# Altium PCB CH340T-BREAKOUT.PcbDoc
Units mm, origin at the board's own origin, x right, y up, seen from the top; angles counter-clockwise.
Board outline 20.38 x 20.38 mm, 2 copper layers (Top Layer, Bottom Layer), stack 1.57 mm thick; 12 components, 21 nets, 70 pads, 17 vias.
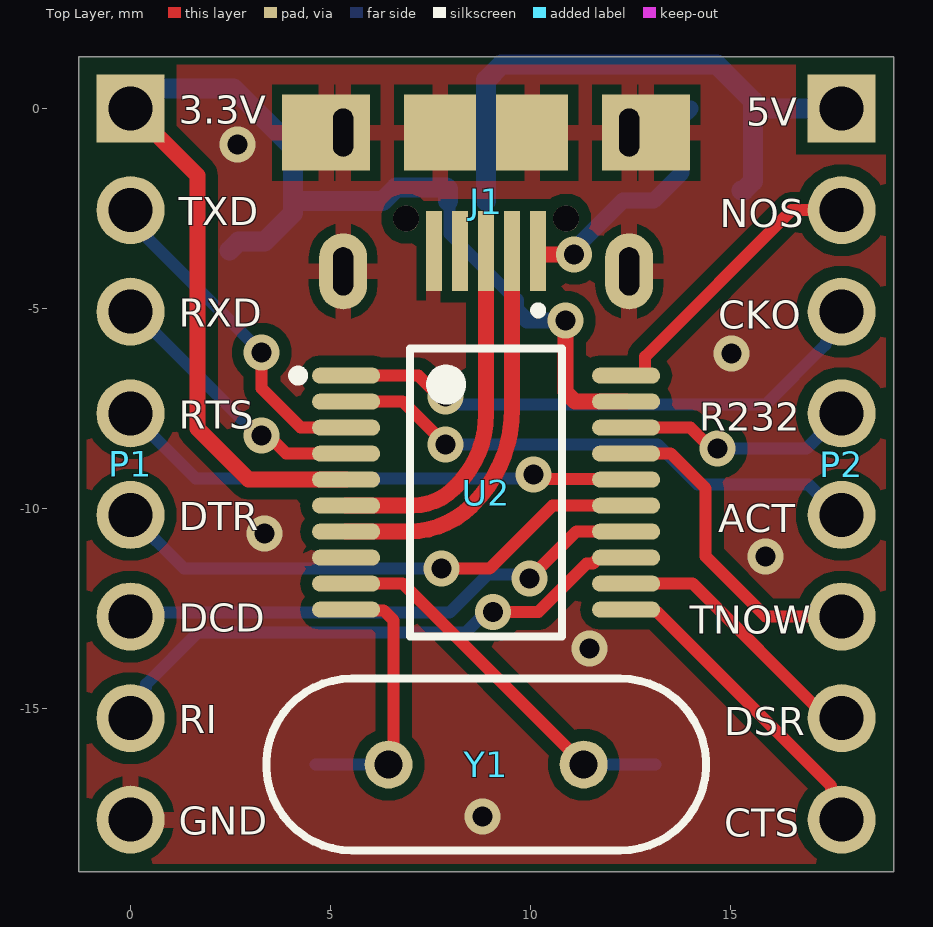
[diagram p0: Top Layer view]
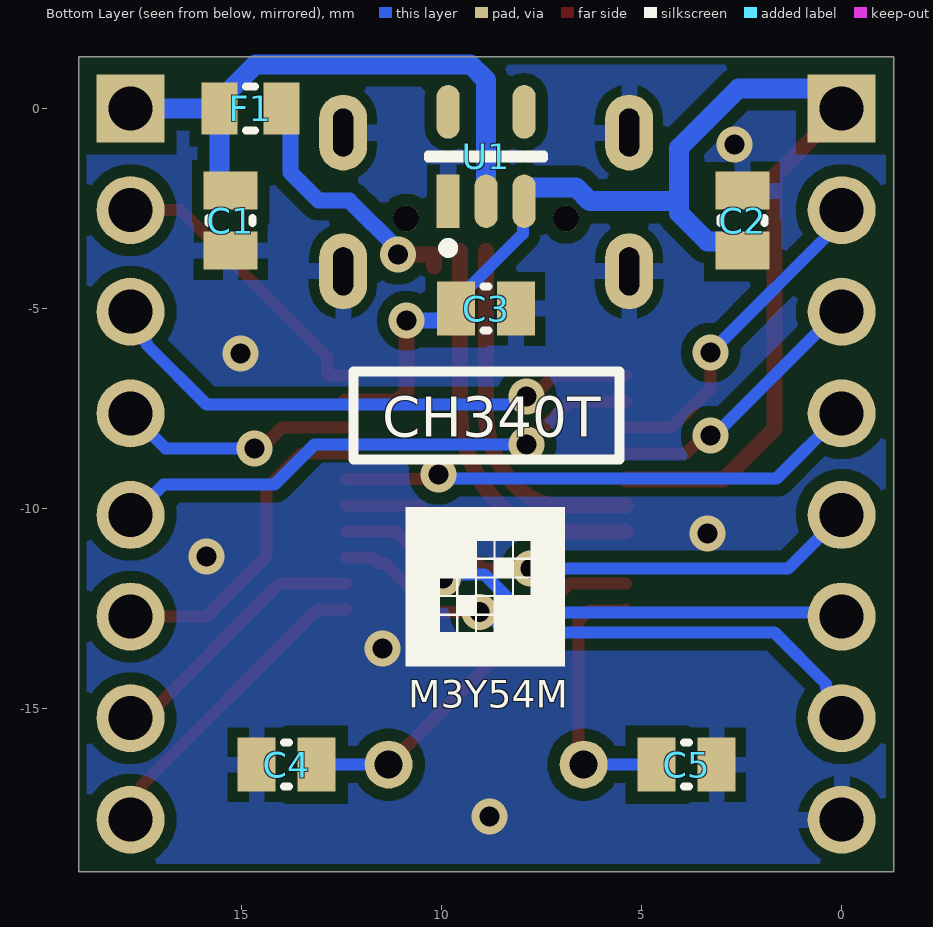
[diagram p1: Bottom Layer view, seen from below]
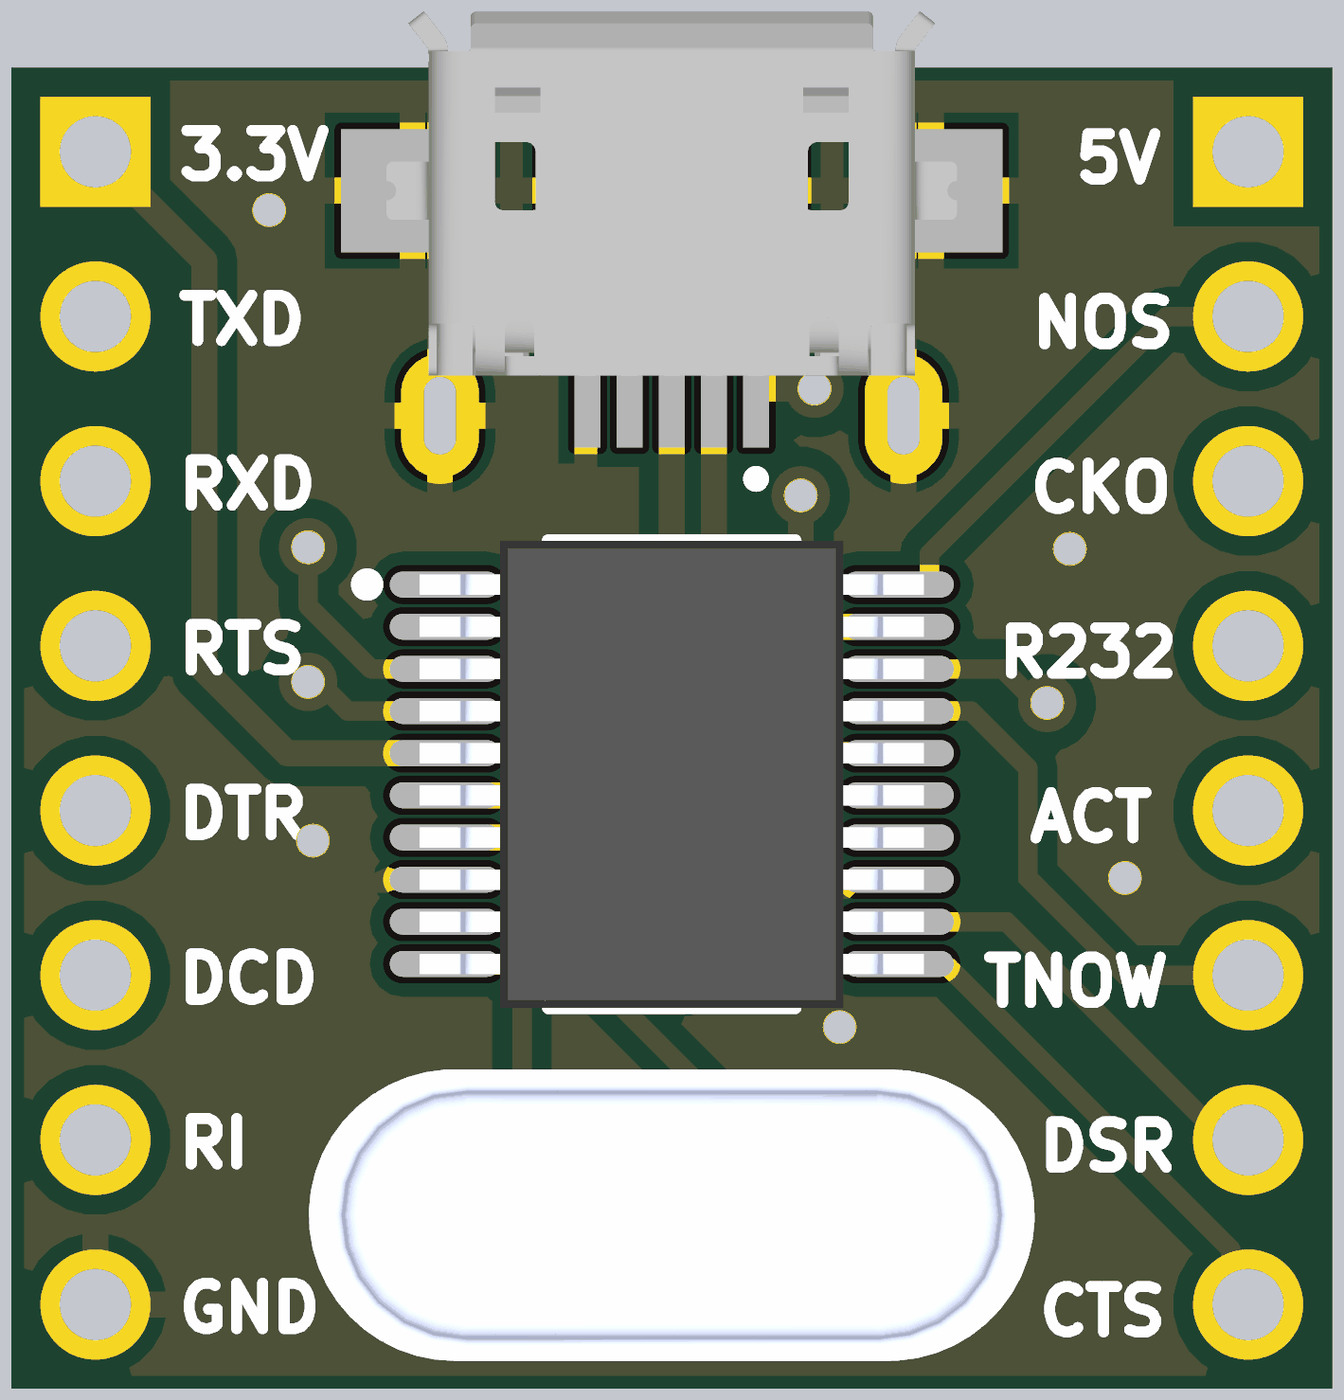
[diagram p2: 3D render of the assembled board from above, using the file's embedded part models]
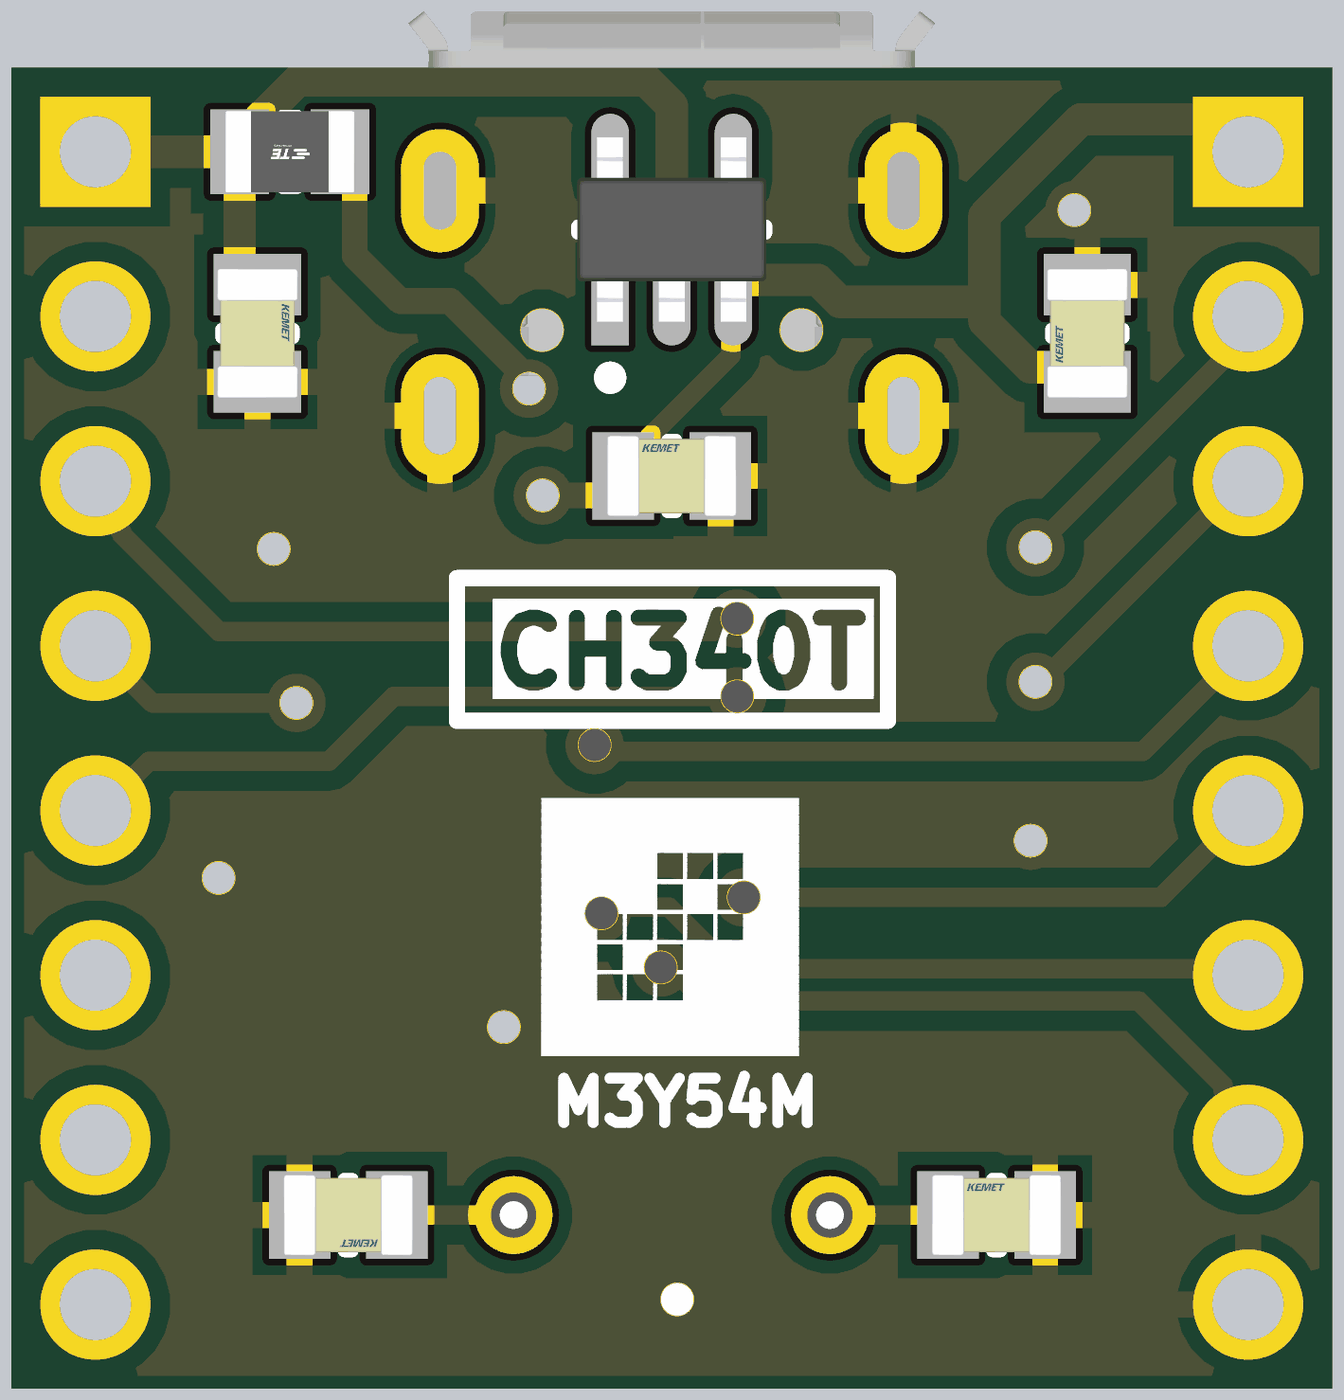
[diagram p3: 3D render of the assembled board from below, using the file's embedded part models]

## Layer stack, top to bottom
Top Solder: solder mask 0.015, Solder Resist, Dk 3.5
Top Layer: signal copper 0.035
Dielectric 1: dielectric 1.5, FR-4, Dk 4.2
Bottom Layer: signal copper 0.035
Bottom Solder: solder mask 0.015, Solder Resist, Dk 3.5

## Board outline
-1.3,-19.08 -1.3,1.3 19.08,1.3 19.08,-19.08

## Design rules (kind name [scope] priority, off if disabled: settings)
BoardOutlineClearance [All] p1: gap=0.2 ignorepadtopadclearanceinfootprint=FALSE
Clearance Clearance_Polygon_Fiducials [All vs InComponent('FID?')] p1: gap=1.3 ignorepadtopadclearanceinfootprint=FALSE
Clearance Clearance_Polygon [InPolygon] p2: gap=0.3 ignorepadtopadclearanceinfootprint=FALSE
Clearance [All] p3: gap=0.15 ignorepadtopadclearanceinfootprint=FALSE except(0: Arc-Hole Track-Hole SMDPad-Hole THPad-Hole Via-Hole Fill-Hole Poly-Hole Region-Hole Text-Hole)
HoleSize [All] p1: absolutevalues=TRUE maxlimit=3.5 minlimit=0.3 maxpercent=80.000 minpercent=20.000
MinimumSolderMaskSliver [All] p1: minsoldermaskwidth=0.15
PolygonConnect PolygonConnect_Via [IsVia] p1: connectstyle=Direct reliefconductorwidth=0.4 reliefentries=4 polygonreliefangle="90 Angle" airgapwidth=0.25
PolygonConnect [All] p2: connectstyle=Relief reliefconductorwidth=0.4 reliefentries=4 polygonreliefangle="90 Angle" airgapwidth=0.25
RoutingVias [All] p1: holewidth=0.4 width=0.7 viastyle="Through Hole" minholewidth=0.4 minwidth=0.6 maxholewidth=2 maxwidth=3
SilkToSilkClearance [All] p1: silktosilkclearance=0.15
SilkToSolderMaskClearance [IsPad] p1: minsilkscreentomaskgap=0.1 clearancetoexposedcopper=TRUE
SolderMaskExpansion SolderMaskExpansion_Via [IsVia] p1: expansion=0.102 istentingtop=TRUE soldermaskfromhole=TRUE
SolderMaskExpansion [All] p2: expansion=0.102 istentingtop=FALSE
Width [All] p1: maxlimit=2 minlimit=0.25 preferedwidth=0.3
26 further rules are at their usual default settings.

## Components (designator, comment, footprint, x,y, rotation, side; value= is the part's Value field where it differs from the comment)
C1 "C0805C104K5RAC7411" C0805 15.28,-2.8 r270 bottom value=10uF_50V
C2 "C0805C104K5RAC7411" C0805 2.48,-2.8 r90 bottom value=10uF_50V
C3 "C0805C104K5RAC7411" C0805 8.89,-5 r180 bottom value=100nF_50V
C4 "C0603C220J5GACAUTO" C0805 13.88,-16.4 r0 bottom value=22pF_50V
C5 "C0603C220J5GACAUTO" C0805 3.88,-16.4 r180 bottom value=22pF_50V
F1 "MF-PSMF050X-2" R0805 14.78,0 r0 bottom value=500mA_6V_PTC
J1 "629105150921" CON-MICRO-USB-B-SMD-WITH-HOLDER 8.89,-0.6 r180 top
P1 "CON-HDR-1X8" CON-HDR-1X8-2.54 0,0 r270 top
P2 "CON-HDR-1X8" CON-HDR-1X8-2.54 17.78,0 r270 top
U1 "HT7533-2-SOT23-5" SOT-23-5 8.89,-1.2 r90 bottom
U2 "CH340T" SSOP-20 8.89,-9.6 r0 top
Y1 "12MHz" HC-49-US-TH 8.89,-16.4 r180 top

## Footprints (in the part's own frame and the unit in brackets; to place one, negate y for a bottom-side part, rotate by r counter-clockwise, add the part's x,y. Pads: shape width x height; smd on the part's side, far side on the other; paste and mask are expansions set on the pad)
C0805 [mm] "FP-C0805C-DN-MFG"
  rect 0.95x1.35 smd: 1(-0.75,0) 2(0.75,0)
  silkscreen extent -0.06,-0.55 0.06,0.55, body extent -1,-0.63 1,0.63, height 0.88
CON-HDR-1X8-2.54 [mm] "Connector; Header; 8 Position, 2.54 Pitch"
  rect 1.7x1.7 hole 1.1 paste-1000 mask+0: 1(0,0)
  round 1.7 hole 1.1 paste-1000 mask+0: 2(2.54,0) 3(5.08,0) 4(7.62,0) 5(10.16,0) 6(12.7,0) 7(15.24,0) 8(17.78,0)
CON-MICRO-USB-B-SMD-WITH-HOLDER [mm] "MICRO USB 5P female seat B type 7.2 four-pin board foot length 1.3 with column curling"
  rect 0.4x2 smd: 1(-1.3,2.96) 2(-0.65,2.96) 3(0,2.96) 4(0.65,2.96) 5(1.3,2.96)
  rect 2.2x1.9 smd: Shell(-4,0) Shell(4,0)
  oval 1.2x1.9 hole 0.5 slot 1.2 at 90 deg: Shell(-3.575,3.47) Shell(-3.575,0) Shell(3.575,3.47) Shell(3.575,0)
  rect 1.8x1.9 smd: Shell(-1.15,0) Shell(1.15,0)
  round 0.65 hole 0.65 paste+0 mask+0: ""(-2,2.15) ""(2,2.15)
  silkscreen extent -1.4,4.35 -1.2,4.54, body extent -4.4,-2.77 4.4,2.86, height 2.79
HC-49-US-TH [mm] "THD, 2-Leads, Body 11.35x4.65mm, Pitch 4.88mm"
  round 1.2 hole 0.7: 1(-2.44,0) 2(2.44,0)
  silkscreen extent -5.5,-2.15 5.5,2.15, body extent -5.42,-2.25 5.43,2.25, height 3.68
R0805 [mm] "FP-CRG0805-IPC_C"
  rect 0.906x1.307 smd: 1(-0.776,0) 2(0.776,0)
  silkscreen extent -0.11,-0.55 0.11,0.55, body extent -1,-0.63 1,0.63, height 0.65
SOT-23-5 [mm]
  rect 1.338x0.578 smd: 1(-1.116,0.95)
  rrect100% 1.338x0.578 smd: 2(-1.116,0) 3(-1.116,-0.95) 4(1.116,-0.95) 5(1.116,0.95)
  silkscreen extent -2.41,-1.45 0.05,1.45, body extent -1.42,-1.46 1.42,1.46, height 1.08
SSOP-20 [mm] "SSOP20-0.65-7.6X5.2MM"
  oval 1.7x0.4 smd: 1(-3.5,2.925) 2(-3.5,2.275) 3(-3.5,1.625) 4(-3.5,0.975) 5(-3.5,0.325) 6(-3.5,-0.325) 7(-3.5,-0.975) 8(-3.5,-1.625) 9(-3.5,-2.275) 10(-3.5,-2.925) 11(3.5,-2.925) 12(3.5,-2.275) 13(3.5,-1.625) 14(3.5,-0.975) 15(3.5,-0.325) 16(3.5,0.325) 17(3.5,0.975) 18(3.5,1.625) 19(3.5,2.275) 20(3.5,2.925)
  silkscreen extent -4.82,-3.6 1.9,3.6, body extent -3.89,-3.6 3.89,3.6, height 1.99

## Part data
C1 C2 C3: library part CAPACITOR, "C0805 0.10 μF X7R 30ppm/°C 10.00% 50 V", Capacitance=100nF, Manufacturer=KEMET, Package=C0805C-DN, Temperature="-55°C to +125°C", Temperature Characteristic=X7R, Temperature Coefficient=30ppm/°C, Temperature Range High=+125°C, Temperature Range Low=-55°C, Tolerance=0.1, Voltage Rating="50 V", Automotive=No, Category=Cap, ComponentLink2Description=Datasheet, ComponentLink2URL=https://content.kemet.com/datasheets/KEM_C1003_C0G_SMD.pdf, Device Class L1="Passive Components", Device Class L2=Capacitors, Device Class L3="Ceramic Capacitors", Height=0.88mm, Ipc Land Pattern Name=CAPC200125X78, Lead Free=Yes, Manufacturer Part Number=C0805C104K5RAC7411, Material=Ceramic, Octopart=https://octopart.com/c0805c104k5rac7411-kemet-18508045, RoHS=TRUE
C4 C5: library part CAPACITOR, "Cap Ceramic 22pF 50V C0G 5% SMD 0603", ComponentLink2Description=Datasheet, ComponentLink2URL=https://content.kemet.com/datasheets/KEM_C1003_C0G_SMD.pdf
F1: library part FUSE-PTC, "FUSE 500MA SMD (0805) RESETABLE"
J1: library part CON-MICRO-USB-AB-RCPT-SMD, "Micro USB 2.0 Type AB Receptacle WR-COM, Horizontal, SMT", Contact Resistance=30mOhm, Manufacturer="Wurth Elektronik", Operating Temperature=-40to85degC, Rated Current=1.8A, Working Voltage=30VAC, Connector Type=MicroUSB2.0TypeAB, Datasheet URL=https://katalog.we-online.de/em/datasheet/629105150921.pdf, Gender=Receptacle, Manufacturer URL=http://www.we-online.de, Mounting Technology=SMT, Orientation=Horizontal, Package Reference=629105150921, Packaging=TapeandReel, Part Number=629105150921, Publisher=WurthElektronik
P1 P2: "Pin Header, 8-Pin", LatestRevisionDate=17-Jul-2002, LatestRevisionNote="Re-released for DXP Platform.", Publisher="Altium Limited"
U1: "100mA 55mV@(1mA) Fixed 3.3V~3.3V Positive 1 30V SOT-23-5 Linear Voltage Regulators (LDO) ROHS"
U2: "CH340 USB 2.0 to UART Interface Evaluation Board", Package=None, Availability=Unavailable, MF="Olimex LTD", MP=CH340T, Price=None, SnapEDA_Link=https://www.snapeda.com/parts/CH340T/Olimex%20LTD/view-part/105740/?ref=snap
Y1: library part CRYSTAL-2P, "CRYSTAL 8.0000MHZ 18PF SMD", Case/Package=SMD/SMT, ESR (Equivalent Series Resistance)=80R, Frequency=8MHz, Frequency Stability=50ppm, Frequency Tolerance=20ppm, Load Capacitance=18pF, Max Operating Temperature=70°C, Min Operating Temperature=-20°C, Operating Frequency="8 MHz", Package Quantity=1000, Accuracy=20ppm, Contact Plating=Tin, Depth=4.7mm, Height=0.165inch, Lead Free="Lead Free", Length=11.4mm, Mount="Surface Mount", Number of Pins=2, Packaging="Tape and Reel", Radiation Hardening=No, REACH SVHC="No SVHC", Series=ABLS, Series Resistance=80R, Termination=SMD/SMT, Tolerance=20ppm, Width=4.7mm

## Via types
v1: diameter 0.9, hole 0.5, Top Layer to Bottom Layer, tented both sides, 17 vias

## Nets (pads, with @x,y where several pads share a name; then routed paths per layer and width w, separated by ;. In a path a pad name is that pad's centre, name@x,y a point inside that pad or via, vN(x,y) a via of type N, cw(c..) or ccw(c..) an arc to the next point about the centre after c; other vN are vias at no path point)
+3V3: C2.1 C3.1 P1.1 U1.3 U2.5 U2.19 | length 33.9
  Top Layer w0.4: P1.1 0.65,-0.65 1.68,-1.68 1.68,-8 2.955,-9.275 U2.5 ; v1(10.88,-5.3) 10.88,-7.091 11.114,-7.325 U2.19
  Bottom Layer w0.3: U1.3@7.974,-2.35 7.974,-3.134 C3.1@9.64,-4.8
  Bottom Layer w0.4: U1.3 U1.3@7.974,-2.35 ; C3.1@9.64,-4.8 9.64,-5.025 9.915,-5.3 v1(10.88,-5.3)
  Bottom Layer w0.5: P1.1 0.5,0.5 2.58,0.5 4.068,-0.988 4.068,-2.316 ; C2.1 2.705,-3.325 3.355,-3.325 4.068,-2.613 4.068,-2.316 ; U1.3 7.94,-2.011 7.904,-1.975 6.64,-1.975 6.298,-2.316 4.068,-2.316
+5V: C1.1 F1.2 P2.1 U1.2 | length 14.8
  Bottom Layer w0.5: U1.2 8.89,0.71 9.28,1.1 14.657,1.1 15.556,0.201 F1.2 ; C1.1 15.331,-2.05 15.556,-1.825 F1.2 ; P2.1 F1.2
ACT: P2.5 U2.2 | length 13.6
  Top Layer w0.3: U2.2 6.805,-7.325 v1(7.88,-8.4)
  Bottom Layer w0.3: v1(7.88,-8.4) 13.18,-8.4 14.18,-9.4 16.95,-9.4 17.71,-10.16 P2.5
CKO: P2.3 U2.1 | length 13.9
  Top Layer w0.3: U2.1 7.193,-6.675 7.718,-7.2 v1(7.88,-7.2)
  Bottom Layer w0.3: v1(7.88,-7.2) 8.042,-7.2 8.242,-7.4 15.88,-7.4 17.371,-5.909 17.371,-5.868 17.78,-5.459 P2.3
CTS: P2.8 U2.11 | length 7.9
  Top Layer w0.3: U2.11 13.067,-12.525 13.117,-12.575 13.155,-12.575 17.512,-16.932 17.512,-17.512 P2.8
DCD: P1.6 U2.14 | length 13.3
  Top Layer w0.3: v1(9.974,-11.744) 11.143,-10.575 U2.14
  Bottom Layer w0.3: P1.6 0.1,-12.6 7.98,-12.6 8.93,-11.65 9.88,-11.65 v1(9.974,-11.744)
DSR: P2.7 U2.12 | length 6.8
  Top Layer w0.3: U2.12 14.055,-11.875 17.42,-15.24 P2.7
DTR: P1.5 U2.15 | length 13.6
  Top Layer w0.3: v1(7.78,-11.5) 8.98,-11.5 10.555,-9.925 U2.15
  Bottom Layer w0.3: P1.5 1.34,-11.5 v1(7.78,-11.5)
GND: C1.2 C2.2 C3.2 C4.2 C5.2 J1.5 J1.Shell P1.8 U1.1 U2.8
  other v1: 8.805,-17.7 11.48,-13.5 15.88,-11.2 3.355,-10.625 15.03,-6.125 2.68,-0.9
NetC4_1: C4.1 U2.9 Y1.1 | length 9.6
  Top Layer w0.3: U2.9 6.805,-11.875 Y1.1
  Bottom Layer w0.3: Y1.1 C4.1
NetC5_1: C5.1 U2.10 Y1.2 | length 6.8
  Top Layer w0.3: U2.10 5.409,-12.544 6.324,-12.544 6.58,-12.8 6.58,-16.27 Y1.2
  Bottom Layer w0.3: C5.1 Y1.2
NetF1_1: F1.1 J1.1 | length 6.5
  Top Layer w0.4: J1.1@10.19,-3.953 10.19,-3.653 v1(11.092,-3.653)
  Bottom Layer w0.4: v1(11.092,-3.653) 11.092,-3.517 12.309,-2.3 13.08,-2.3 13.78,-1.6 13.78,-0.224 F1.1
NOS: P2.2 U2.20 | length 7.4
  Top Layer w0.3: U2.20 12.818,-6.675 12.864,-6.629 12.864,-6.201 16.525,-2.54 P2.2
R232: P2.4 U2.18 | length 6.4
  Top Layer w0.3: U2.18 13.993,-7.975 14.518,-8.5 v1(14.68,-8.5) ; P2.4@17.401,-7.62 P2.4
  Bottom Layer w0.3: v1(14.68,-8.5) 16.9,-8.5 P2.4
RI: P1.7 U2.13 | length 14.3
  Top Layer w0.3: v1(9.06,-12.58) 10.199,-12.58 11.404,-11.375 11.563,-11.375 11.713,-11.225 U2.13
  Bottom Layer w0.3: P1.7 0,-14.861 0.389,-14.472 0.389,-14.391 1.68,-13.1 8.378,-13.1 8.898,-12.58 v1(9.06,-12.58)
RTS: P1.4 U2.16 | length 13.2
  Top Layer w0.3: v1(10.08,-9.15) 10.186,-9.256 12.371,-9.256 U2.16
  Bottom Layer w0.3: P1.4 1.63,-9.25 9.98,-9.25 v1(10.08,-9.15)
RXD: P1.3 U2.4 | length 6.9
  Top Layer w0.3: v1(3.28,-8.175) 3.442,-8.175 3.892,-8.625 U2.4
  Bottom Layer w0.3: P1.3 0.092,-5.08 3.187,-8.175 v1(3.28,-8.175)
TNOW: P2.6 U2.17 | length 8.1
  Top Layer w0.3: U2.17 13.505,-8.625 14.38,-9.5 14.38,-11.2 15.88,-12.7 P2.6
TXD: P1.2 U2.3 | length 8.3
  Top Layer w0.3: v1(3.28,-6.1) 3.28,-7 4.255,-7.975 U2.3
  Bottom Layer w0.3: P1.2 0,-2.82 v1(3.28,-6.1)
USB_DM: J1.2 U2.7 | length 10
  Top Layer w0.4: U2.7 6.95,-10.575 ccw(c6.95,-8.324) 8.54,-9.917 ccw(c6.133,-7.507) 9.54,-7.505 J1.2
USB_DP: J1.3 U2.6 | length 9
  Top Layer w0.4: U2.6 7.054,-9.925 ccw(c7.054,-8.474) 8.08,-9.5 8.146,-9.434 ccw(c6.35,-7.638) 8.89,-7.638 J1.3
pads on no net: J1. J1.4 U1.4 U1.5

## Polygon pours and split planes (outlines as drawn)
GND on Top Layer "GND_L01_P001" (solid, remove dead copper, pour order 1): -1.3,-19.08 -1.3,1.3 19.08,1.3 19.08,-19.08
GND on Bottom Layer "GND_L02_P000" (solid, remove dead copper, pour order 0): -1.3,-19.08 -1.3,1.3 19.08,1.3 19.08,-19.08

## Silkscreen, mask and mechanical layers (free items; w line width, h text height)
Top Overlay:
  text "3.3V" at 1.2,-0.38 h0.7
  text "5V" at 15.394,-0.43 h0.7
  text "TXD" at 1.2,-2.92 h0.7
  text "NOS" at 14.727,-2.97 h0.7
  text "RXD" at 1.2,-5.46 h0.7
  text "CKO" at 14.697,-5.51 h0.7
  text "RTS" at 1.2,-8 h0.7
  text "R232" at 14.214,-8.05 h0.7
  text "DTR" at 1.2,-10.54 h0.7
  text "ACT" at 14.691,-10.59 h0.7
  text "DCD" at 1.2,-13.08 h0.7
  text "TNOW" at 13.978,-13.13 h0.7
  text "RI" at 1.2,-15.62 h0.7
  text "DSR" at 14.837,-15.67 h0.7
  text "GND" at 1.2,-18.16 h0.7
  text "CTS" at 14.837,-18.21 h0.7
Bottom Overlay:
  drawing of 5 lines, arcs and shapes, not listed
  text "CH340T" at 11.493,-8.2 h1
  text "M3Y54M" at 10.835,-14.979 h0.68
Mechanical 1:
  the board outline again, w0.1

## Text inside footprints (layer, text, board x,y; h text height)
J1: Top 3D Body "PCB Edge" at 10.414,1.178 h0.41 r180